# Altium PCB Rackmount_DSP.PcbDoc (part 12 of 24)
Units mil, origin at the board's own origin, x right, y up, seen from the top; angles counter-clockwise.
Board outline 10629.92 x 8267.72 mil, 4 copper layers (Top Layer, Mid Layer 1, Mid Layer 2, Bottom Layer), stack 36.2 mil thick; 4500 components, 1565 nets, 9765 pads, 3289 vias.
Unrouted connection lines stored in the file: 1.
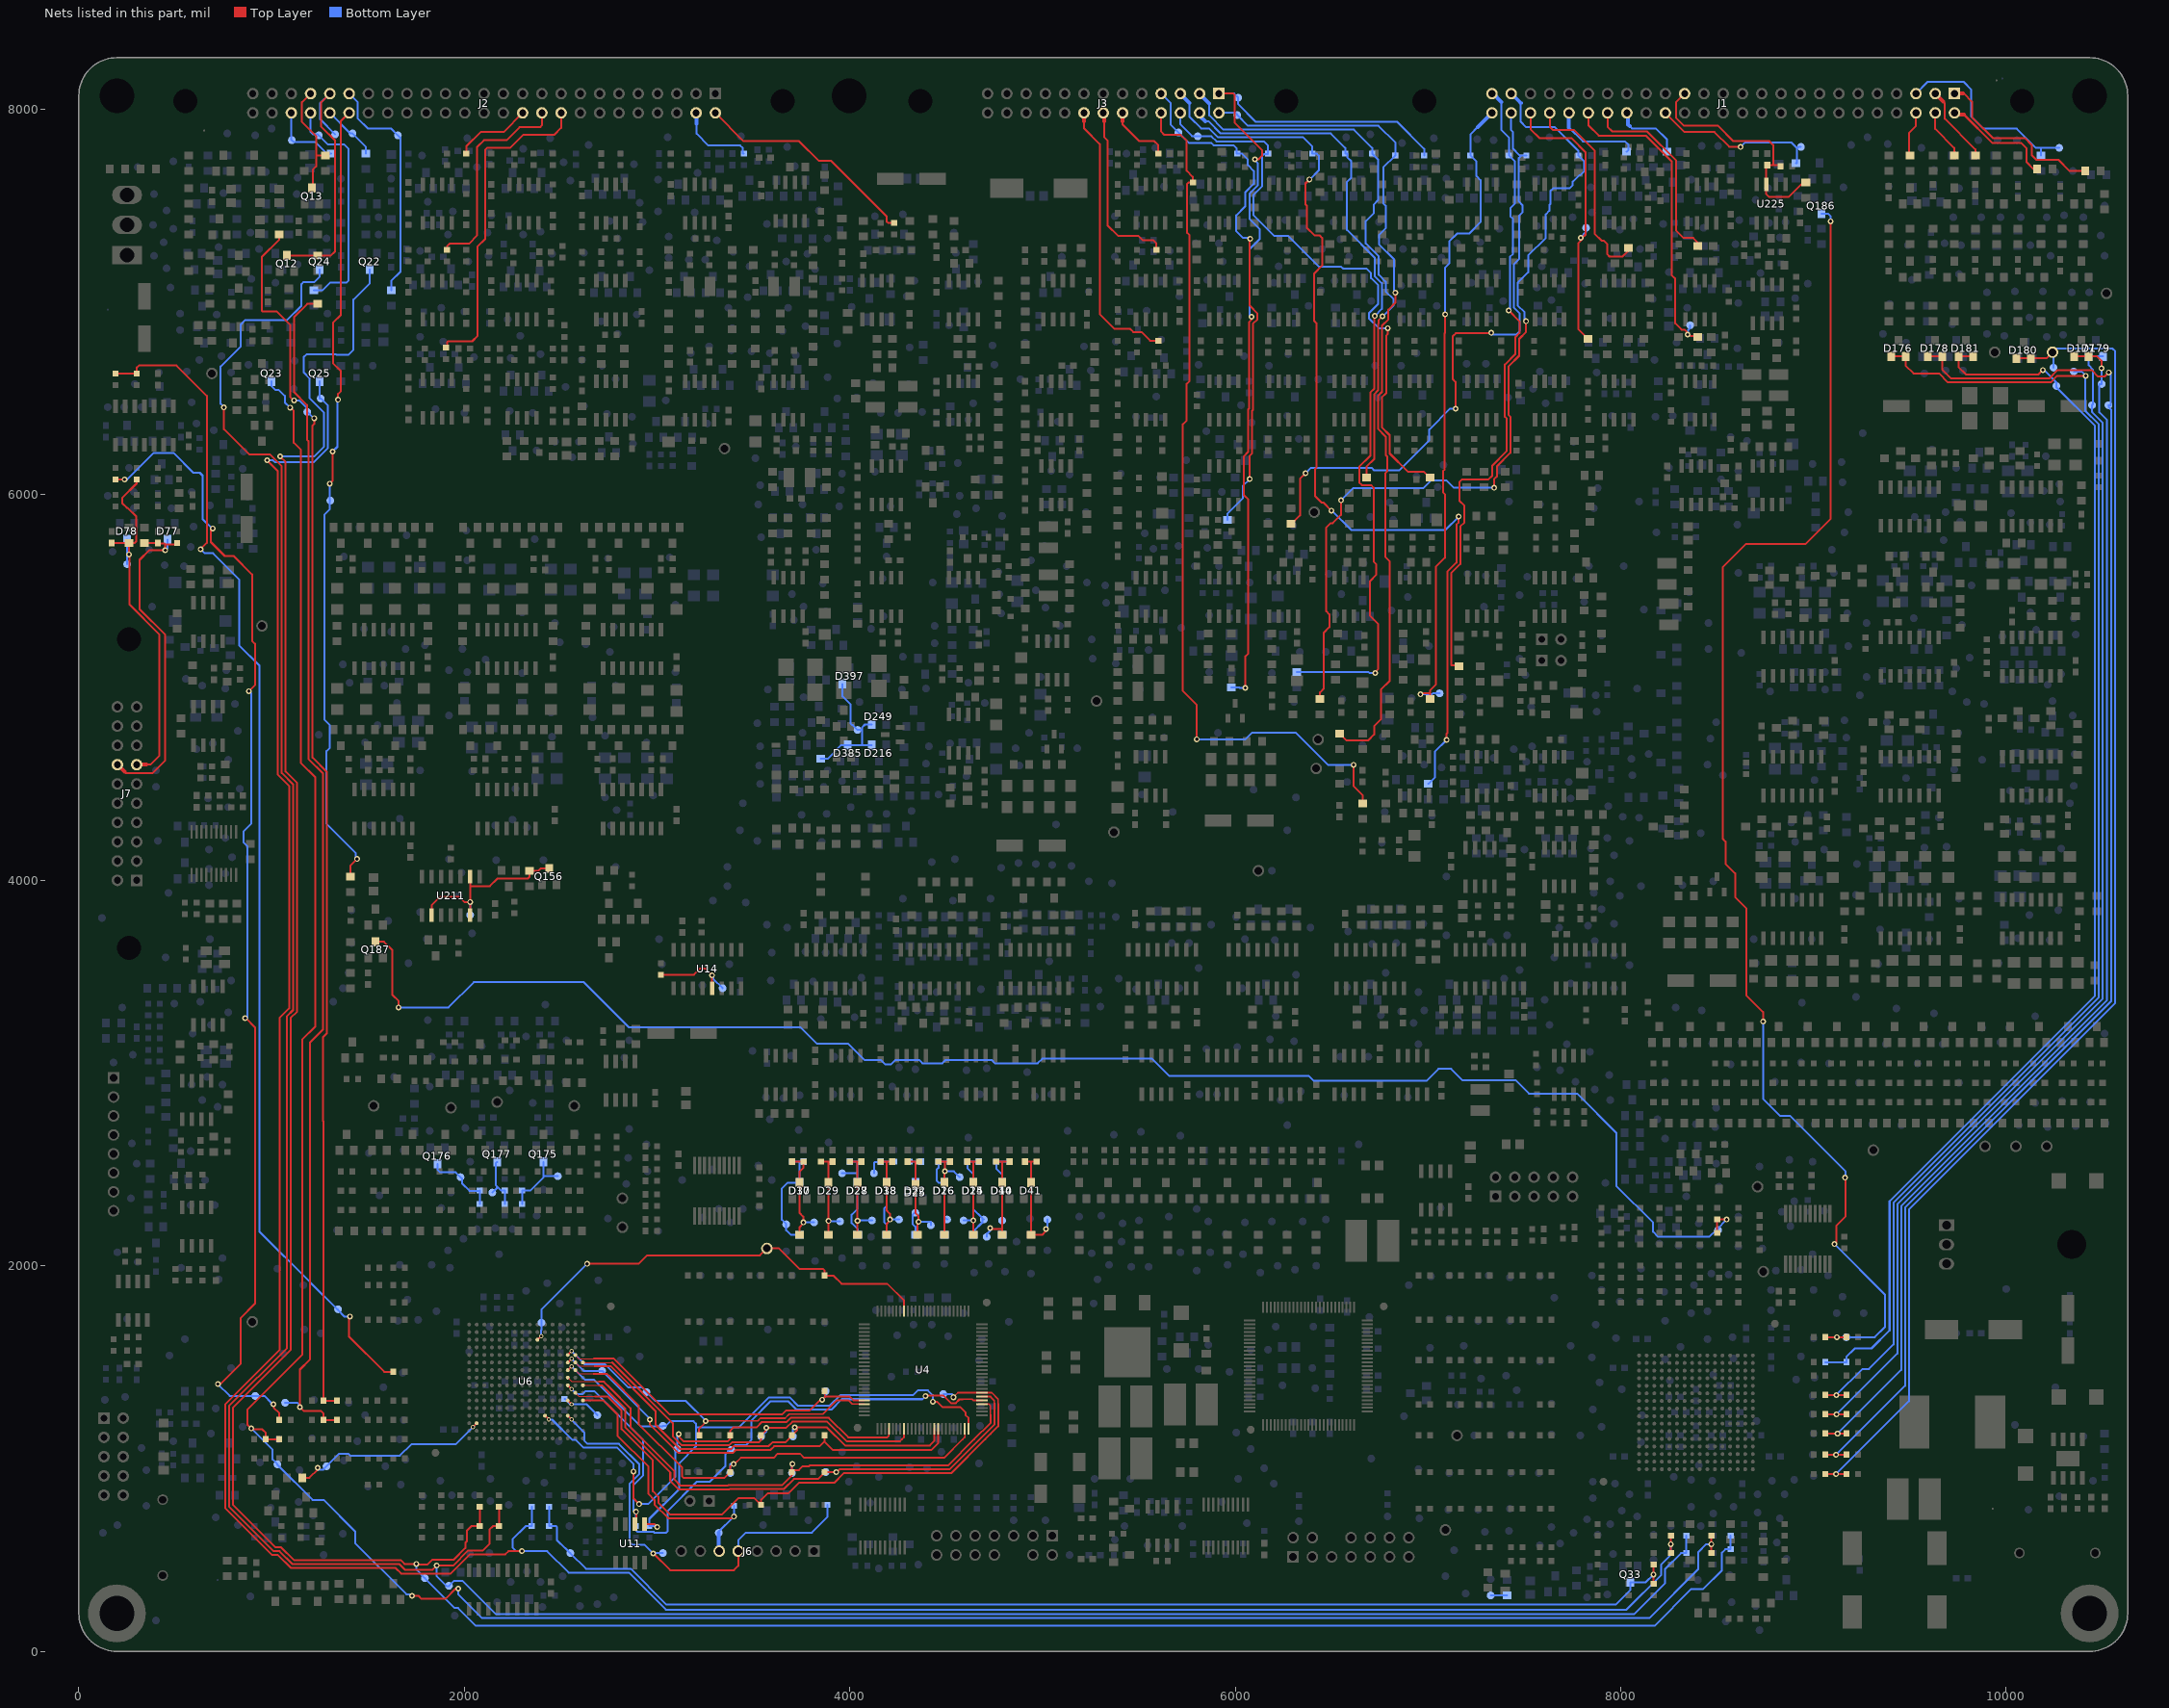
[diagram p14: the nets of this part, all layers, seen from the top]

## Via types
v1: diameter 30, hole 16, Top Layer to Bottom Layer, 3143 vias
v2: diameter 22, hole 12, Top Layer to Bottom Layer, 146 vias

## Nets (pads, with @x,y where several pads share a name; then routed paths per layer and width w, separated by ;. In a path a pad name is that pad's centre, name@x,y a point inside that pad or via, vN(x,y) a via of type N, cw(c..) or ccw(c..) an arc to the next point about the centre after c; other vN are vias at no path point) (continued)
INV_GPIO_22: R772.2 TP619.1 U4.71 U6.B5 | length 1755.1
  Top Layer w6: U6.B5@2575.91,1537.8 2594.91,1518.8 2672.85,1518.8
  Top Layer w9: 3432.28,1229 3606.54,1229 ; 3792.26,1250.6 3847.07,1305.41 v1(3855.91,1305.41) 3856.39,1305.41 3872.47,1321.5 ; R772.2@3870,1350 3870,1323.97 3872.47,1321.5 ; U4.71@4074.88,1302.52 4040,1302.52 4018.98,1302.52 4000,1321.5 3872.47,1321.5
  Top Layer w10: 2672.85,1518.8 2755,1518.8 2775.47,1518.8 3065.27,1229 3432.28,1229 ; 3606.54,1229 3648.84,1229 3670.44,1250.6 3792.26,1250.6
  Bottom Layer w10: v1(3855.91,1305.41) 3875,1324.5 TP619.1@3875,1350
INV_GPIO_23: R769.2 TP235.1 U4.72 U6.C5 | length 1845.1
  Top Layer w9: 3230.02,1167.25 3252.59,1189.82 v1(3252.59,1193.96) 3252.59,1196.11 3522.7,1196.11 3536.09,1209.5 3664.14,1209.5 3685.73,1231.1 3860.23,1231.1 3931.63,1302.5 3992.13,1302.5 4011.79,1282.83 4040,1282.83 U4.72@4074.88,1282.83
  Top Layer w10: U6.C5@2536.54,1537.8 v2(2556.22,1557.48) ; R769.2@3220,1120 3216.47,1120 3216.47,1153.7 3230.02,1167.25
  Bottom Layer w10: v2(2556.22,1557.48) 2623.7,1490 2729.5,1490 2849.75,1369.75 2920.25,1369.75 TP235.1@2945,1345 2990.88,1299.12 3149.59,1299.12 3252.59,1196.11 v1(3252.59,1193.96)
INV_GPIO_24: R766.2 TP620.1 U4.83 U6.A6 | length 2107
  Top Layer w6: U6.A6@2615.28,1498.43 2755,1498.43 2767.56,1498.43 ; R766.2@3540,1119 R766.2@3540,1120
  Top Layer w9: 4158.27,1090.38 4261.07,1090.38 4270.69,1100 4281.57,1110.88 U4.83@4281.57,1154.88
  Top Layer w10: 2767.56,1498.43 3081.89,1184.09 3081.89,1115.1 3127.99,1069 3373.55,1069 3390.32,1085.78 3529.26,1085.78 3540,1096.52 R766.2@3540,1119 ; R766.2@3540,1120 3540,1121 3566.98,1147.98 v1(3566.98,1159.77) 3670.27,1159.77 3702.1,1191.6 3882.02,1191.6 3983.23,1090.38 4158.27,1090.38
  Bottom Layer w10: TP620.1@3540,1115 3566.98,1141.98 v1(3566.98,1159.77)
INV_GPIO_25: R856.2 TP621.1 U4.91 U6.B6 | length 2323.8
  Top Layer w6: U6.B6@2575.91,1498.43 2594.91,1479.43 2674.47,1479.43
  Top Layer w9: 4414.95,1068.53 4439.06,1092.63 4439.06,1100 U4.91@4439.06,1154.88
  Top Layer w10: 2674.47,1479.43 2755,1479.43 2758.27,1479.43 2992.18,1245.51 2992.18,1176.52 3119.71,1049 3382.7,1049 3398.65,1064.96 3579.1,1064.96 3598.62,1084.47 3665.47,1084.47 3700,1119 R856.2@3700,1120 3700,1121 3725.61,1146.61 3725.61,1152.7 v1@3716.71,1161.6 ; v1(3714.52,1161.6) v1@3716.71,1161.6 ; 4414.95,1068.53 4414.95,1067.51 3975.64,1067.51 3881.56,1161.6 v1@3716.71,1161.6
  Bottom Layer w10: TP621.1@3705,1115 3705,1152.08 v1(3714.52,1161.6)
INV_GPIO_26: R857.2 TP622.1 U4.99 U6.B7 | length 2581.7
  Top Layer w6: U6.B7@2575.91,1459.06 2594.97,1439.99 2671.22,1439.99 2671.22,1440.27
  Top Layer w9: R857.2@3380,930 3380,959.33 3388.39,967.72 v1@3388.39,971.32 ; v1@3394.17,977.1 v1@3388.39,971.32 ; v1(3397.02,971.32) v1@3388.39,971.32 ; v1@3400.59,970.69 3434.32,1004.42 3605.32,1004.42 3625.88,1024.97 3741.66,1024.97 3762.28,1004.35 4490.01,1004.35 4585.65,1100 4596.54,1110.88 U4.99@4596.54,1154.88
  Top Layer w10: 2671.22,1440.27 2739.67,1440.27 2755,1424.93 2904.73,1275.2 2904.73,1179.12 3128.5,955.35 3128.5,909.29 3138.79,899 3349,899 R857.2@3380,930 ; v1@3394.17,977.1 v1@3400.59,970.69
  Bottom Layer w10: TP622.1@3380,925 3380,971.32 3388.39,971.32 v1(3397.02,971.32)
INV_GPIO_27: R855.2 TP234.1 U4.79 U6.F13 | length 2530.3
  Top Layer w9: 4147.33,1110.38 4193.86,1110.38 4202.83,1119.36 U4.79@4202.83,1154.88
  Top Layer w10: U6.F13@2418.43,1222.83 v2(2438.11,1203.15) ; v1(2878.15,933.51) 2878.15,793.83 2878.15,792.39 v1(2906.39,764.15) ; v1(3111.89,1127.52) 3111.89,1115.89 3138.79,1089 3364.94,1089 3380,1104.06 R855.2@3380,1120 3380,1145.66 3395.6,1161.26 3515.43,1161.26 3544.17,1190 3672.21,1190 3693.81,1211.6 3891,1211.6 3992.22,1110.38 4040,1110.38 4147.33,1110.38
  Bottom Layer w10: v2(2438.11,1203.15) 2439.07,1202.19 2455.3,1202.19 2560.97,1096.51 2578.44,1096.51 2618.6,1056.36 2793.14,1056.36 2878.15,971.35 v1(2878.15,933.51) ; v1(2906.39,764.15) 2906.39,764.57 2953.65,764.57 3094.91,905.83 3094.91,1034.49 3105,1044.57 TP234.1@3105,1050 3105,1122.78 3109.74,1127.52 v1(3111.89,1127.52)
INV_GPIO_28: R765.2 TP233.1 U4.92 U6.C6 | length 2315.7
  Top Layer w9: 4392.04,1045.37 4423.84,1045.37 4458.74,1080.28 4458.74,1100 U4.92@4458.74,1154.88
  Top Layer w10: U6.C6@2536.54,1498.43 v2(2556.22,1518.11) ; v1(2962.18,1201.76) 2962.18,1178.24 3111.42,1029 3392.35,1029 3408.12,1044.77 3587.62,1044.77 3607.33,1064.47 3843.65,1064.47 3870,1090.82 ; R765.2@3870,1120 3870,1090.82 ; 4392.04,1045.37 3910.84,1045.37 3870,1086.22 3870,1090.82
  Bottom Layer w10: v2(2556.22,1518.11) 2619.33,1455 TP233.1@2715,1455 2962.18,1207.82 v1(2962.18,1201.76)
INV_GPIO_29: R768.2 TP623.1 U4.4 U6.C8 | length 2879.1
  Top Layer w6: U6.C8@2536.54,1419.68 2555.66,1400.56 2696.72,1400.56
  Top Layer w9: U4.4@4685.12,1282.83 4721.15,1282.83 4729.62,1274.36 4729.62,1227.33
  Top Layer w10: 2696.72,1400.56 2705.87,1400.56 2708.11,1398.31 2724.46,1398.32 2755,1367.78 2861.28,1261.5 2861.28,1163.96 3088.5,936.75 3088.5,892.72 3122.22,859 3365.57,859 3368.49,861.92 3648.67,861.92 3700,913.25 R768.2@3700,930 R768.2@3700,941 ; v1(3702.69,972.79) 3700,970.1 R768.2@3700,941 ; 4729.62,1227.33 4729.62,1184.28 4645.34,1100 4509.29,963.95 3791.74,963.95 3787.79,960 3754.8,960 3735.8,941 R768.2@3700,941
  Bottom Layer w10: TP623.1@3700,925 3700,970.1 v1(3702.69,972.79)
INV_GPIO_30: R771.2 TP624.1 U4.6 U6.A9 | length 2834.8
  Top Layer w6: U6.A9@2615.28,1380.32 2696.53,1380.32 2698.62,1378.22
  Top Layer w9: U4.6@4685.12,1322.2 4729.12,1322.2 4730,1321.32 4749.62,1301.7 4749.62,1286.7
  Top Layer w10: 2698.62,1378.22 2715.98,1378.22 2755,1339.2 2835.77,1258.43 2835.77,1160.89 3068.5,928.17 3068.5,884.44 3113.93,839 3373.85,839 3376.04,841.18 3656.5,841.18 3709.75,894.44 3835.44,894.44 3870,929 R771.2@3870,930 v1(3929.65,930) 3932.48,930 3946.43,943.95 4517.57,943.95 4673.62,1100 4730,1156.38 4749.62,1176 4749.62,1286.7
  Bottom Layer w10: TP624.1@3875,930 v1(3929.65,930)
INV_GPIO_31: R774.2 TP625.1 U4.7 U6.B10 | length 3318.2
  Top Layer w6: U6.B10@2575.91,1340.94 2594.91,1321.94 2678.47,1321.94 2678.47,1322.13
  Top Layer w9: v1(4537.2,1318.18) 4560.91,1341.89 U4.7@4685.12,1341.89 4730,1341.89 4736.3,1341.89 4769.62,1308.57 4769.62,1283.72
  Top Layer w10: 2678.47,1322.13 2742.88,1322.13 2755,1310.01 2815.49,1249.52 2815.49,1152.82 2978.37,989.95 2978.37,830.48 3006.95,801.91 3006.95,770.45 3066.35,711.05 3337.76,711.05 3421.17,794.46 3505.54,794.46 R774.2@3540,760 3540,786.27 3574.75,821.01 3682.8,821.01 3736,874.22 3918.93,874.22 3968.67,923.95 4525.85,923.95 4701.9,1100 4730,1128.1 4769.62,1167.71 4769.62,1283.72
  Bottom Layer w10: TP625.1@4485,1335 4530.13,1335 4537.2,1327.93 v1(4537.2,1318.18)
INV_GPIO_32: R844.2 TP210.1 U4.100 U6.C7 U11.5 | length 3238.9
  Top Layer w9: 4600.48,1239.99 4600.48,1225.87 4616.22,1210.13 U4.100@4616.22,1154.88
  Top Layer w10: U6.C7@2536.54,1459.06 v2(2556.22,1478.74) ; U11.5@2935,660 2986.16,660 2998.86,647.3 3001.07,647.3 v1@3001.07,645.08 ; v1(4430.32,1295.46) 4452.81,1295.46 4480.08,1268.18 4572.29,1268.18 4600.48,1239.99
  Bottom Layer w10: v2(2556.22,1478.74) 2624.71,1410.25 2671.52,1410.25 2914.33,1167.44 3030,1167.44 TP210.1@3030,1170 3046.15,1170 3069.55,1193.4 3189.26,1193.4 3201.67,1180.99 3201.67,1162.73 ; v1(3001.04,645.06) 2996.1,650 R844.2@2960,650 2960,687.6 3114.91,842.51 3114.91,976.1 3201.67,1062.85 3201.67,1162.73 ; v1(4430.32,1295.46) 4430.32,1328.38 4404.69,1354 4353.03,1354 4328.03,1329 3950.67,1329 3896.08,1274.41 3731.09,1274.41 3688.42,1317.08 3580.54,1317.08 3426.19,1162.73 3201.67,1162.73
INV_GPIO_33: R843.2 TP209.1 U4.5 U6.C9 U11.6 | length 3408.7
  Top Layer w9: 4586.18,1307.79 4634.67,1307.79 4639.94,1302.52 U4.5@4685.12,1302.52
  Top Layer w10: U6.C9@2536.54,1380.32 v2(2556.22,1360.63) ; U11.6@2885,660 2891.5,660 2891.5,723.58 v1(2891.01,724.07) ; v1(4392.27,1324) 4392.27,1326.41 4486.55,1326.41 4524.78,1288.18 4549.63,1288.18 4568.28,1306.84 4586.18,1306.84 4586.18,1307.79
  Bottom Layer w10: v2(2556.22,1360.63) 2582.22,1334.63 2613.25,1334.63 2628.62,1350 2673.65,1350 2928.15,1095.5 2928.15,912.79 2876.39,861.03 2876.39,732.3 2884.62,724.07 v1(2891.01,724.07) 2891.01,694.07 2890,693.06 R843.2@2890,650 2890,628.05 2898.05,620 2982.21,620 2987.16,615.06 3045.69,615.06 3055,624.37 3055,728.64 3206.36,880 3272.39,880 3354.7,962.31 3354.7,1024.16 3375.54,1045 TP209.1@3385,1045 3385,1048.29 3405.47,1068.76 3460.65,1068.76 3489.94,1098.05 3489.94,1198.2 3588.82,1297.08 3680.13,1297.08 3722.81,1254.41 3904.36,1254.41 3958.13,1308.18 4376.45,1308.18 v1(4392.27,1324)
INV_GPIO_34: R778.2 TP4.1 TP208.1 U4.43 U6.G3 | length 2359.7
  Top Layer w9: 3959.41,1906.49 4194.67,1906.49 4281.57,1819.59 4281.57,1810 U4.43@4281.57,1765.12
  Top Layer w10: U6.G3@2379.06,1616.54 v2(2398.74,1636.22) ; v1(2636.48,2010.13) 2904.38,2010.13 2949.14,2054.88 3533.1,2054.88 3568.23,2090 TP4.1@3570,2090 3632.62,2090 3738.41,1984.21 3861.15,1984.21 3870,1975.36 R778.2@3870,1950 3913.93,1950 3957.44,1906.49 3959.41,1906.49
  Bottom Layer w10: v2(2398.74,1636.22) 2398.74,1665.48 2400,1666.74 TP208.1@2400,1705 2400,1773.64 v1(2636.48,2010.13)
INV_IINV_A/VINV_DC_A: C320.2 D24.3 R614.1 R915.2 TP626.1 | length 491.2
  Top Layer w10: C320.2@4610,2540 4640,2540 ; R614.1@4640,2160 4640,2178.33 4640.52,2178.85 v1(4640.52,2235) 4640.52,2431.5 D24.3@4640,2431.5 4640,2540 ; R915.2@4670,2540 4640,2540
  Bottom Layer w10: TP626.1@4590,2235 v1(4640.52,2235)
INV_IINV_B/VINV_DC_B: C328.2 D15.3 R625.1 R890.2 TP207.1 | length 500.7
  Bottom Layer w10: R625.1@4640,2160 4642.6,2160 4642.6,2180.6 4687.96,2225.96 TP207.1@4687.96,2240 ; C328.2@4670,2540 R890.2@4610,2540 4610,2506.95 4640,2476.95 D15.3@4640,2431.5 4640,2295 4687.96,2247.04 TP207.1@4687.96,2240 ; TP207.1@4695,2240 TP207.1@4687.96,2240
INV_IINV_C/VINV_DC_C: C326.2 D14.3 R623.1 R888.2 TP627.1 | length 569.8
  Top Layer w10: v1(4727.97,2195.76) 4727.97,2192.03 4790,2192.03 ; R888.2@4760,2540 4788,2540 ; R623.1@4790,2160 4790,2192.03 ; C326.2@4830,2540 4788,2540 ; 4788,2540 4790,2538 D14.3@4790,2431.5 4790,2192.03
  Bottom Layer w10: TP627.1@4710,2150 4710,2163.56 4727.97,2181.53 v1(4727.97,2195.76)
INV_IL_A/IL_AF: C323.2 D25.3 R617.1 R916.2 TP628.1 | length 534.8
  Top Layer w10: C323.2@4300,2540 4340,2540 ; R617.1@4350,2160 4350,2227.83 v1(4356.93,2227.83) 4356.93,2257.83 4340,2274.76 D25.3@4340,2421.5 4340,2540 ; R916.2@4360,2540 4340,2540
  Bottom Layer w10: v1(4356.93,2227.83) 4420,2227.83 TP628.1@4420,2210
INV_IL_B/IL_BF: C322.2 D16.3 R616.1 R920.2 TP629.1 | length 531
  Top Layer w10: R920.2@4460,2540 4492.59,2540 ; R616.1@4490,2160 D16.3@4490,2431.5 4490,2487.69 v1(4492.59,2490.28) 4492.59,2540 ; C322.2@4520,2540 4492.59,2540
  Bottom Layer w10: v1(4492.59,2490.28) 4539.72,2490.28 TP629.1@4570,2460
INV_IL_C/IL_CF: C321.2 D26.3 R615.1 R918.2 TP206.1 | length 498.7
  Bottom Layer w10: R615.1@4490,2160 4490,2255 ; TP206.1@4505,2240 4490,2255 ; R918.2@4520,2540 C321.2@4460,2540 4460,2508.45 4450.74,2499.19 4450.74,2441.14 4460.38,2431.5 D26.3@4490,2431.5 4490,2255
INV_IL_OCP_A: Q175.3 R757.2 R1042.2 TP1873.1 | length 364.5
  Bottom Layer w10: R1042.2@2300,2320 R757.2@2300,2390 2342.75,2390 2410,2457.25 2410,2465.88 ; Q175.3@2410,2538.5 2410,2465.88 ; TP1873.1@2485,2465 2484.12,2465.88 2410,2465.88
INV_IL_OCP_B: Q176.3 R724.2 R1041.2 TP1872.1 | length 378.8
  Bottom Layer w10: Q176.3@1860,2528.5 1860,2499 1874.26,2484.75 1955.25,2484.75 TP1872.1@1980,2460 1988.37,2451.63 1988.37,2427.85 2026.74,2389.47 R724.2@2080,2389.47 ; R1041.2@2080,2320 R724.2@2080,2389.47 ; R724.2@2080,2390 R724.2@2080,2389.47
INV_IL_OCP_C: Q177.3 R722.2 R1040.2 TP1871.1 | length 295
  Bottom Layer w10: TP1871.1@2145,2380 2168.33,2403.33 2168.33,2412.59 ; Q177.3@2170,2538.5 2162.18,2530.68 2162.18,2418.74 2168.33,2412.59 ; R1040.2@2210,2320 R722.2@2210,2390 2190.92,2390 2168.33,2412.59
INV_INDICTOR: R1080.1 TP205.1 U6.R14 | length 1049.3
  Top Layer w10: R1080.1@1160,900 1196.17,900 1239.39,943.22 v1(1239.39,953) ; v2(2044.41,1163.78) U6.R14@2064.09,1183.46
  Bottom Layer w10: v1(1239.39,953) 1239.39,943.22 1268.22,943.22 TP205.1@1285,960 1350,1025 1398.23,1025 1408.23,1015 1665.5,1015 1725,1074.5 1955.13,1074.5 v2(2044.41,1163.78)
INV_OUT_I_A: C316.1 D28.3 R609.1 R922.2 TP630.1 | length 515.4
  Top Layer w10: R922.2@4000,2540 4040,2540 ; R609.1@4040,2160 v1(4040,2233.96) D28.3@4040,2431.5 4040,2540 ; C316.1@4060,2540 4040,2540
  Bottom Layer w10: v1(4040,2233.96) 4041.04,2235 TP630.1@4115,2235
INV_OUT_I_B: C315.1 D29.3 R608.1 R923.2 TP631.1 | length 503.9
  Top Layer w10: R923.2@3850,2540 3886.92,2540 C315.1@3896.93,2540 ; R608.1@3890,2160 v1(3890,2232.6) D29.3@3890,2431.5 3890,2533.07 C315.1@3896.93,2540 ; C315.1@3910,2540 C315.1@3896.93,2540
  Bottom Layer w10: v1(3890,2232.6) 3892.6,2230 TP631.1@3950,2230
INV_OUT_I_C: C314.1 D30.3 R607.1 R924.2 TP632.1 | length 520.1
  Top Layer w10: C314.1@3700,2540 3752,2540 R924.2@3760,2540 3760,2510 3740,2490 D30.3@3740,2431.5 3740,2273.41 3758.41,2255 v1(3758.41,2225) 3758.41,2219.38 3740,2200.98 R607.1@3740,2160
  Bottom Layer w10: v1(3758.41,2225) TP632.1@3815,2225
INV_SCI_RXD: J6.6 R2731.1 TP201.1 U6.A11 | length 1476.3
  Top Layer w10: U6.A11@2615.28,1301.57 2722.08,1301.57 2755,1268.65 2794.14,1229.52 2794.14,1119.28 2955.32,958.09 2955.32,816.39 2986.95,784.76 2986.95,762.16 3058.06,691.05 3398.33,691.05 v1(3398.33,699.11)
  Bottom Layer w10: TP201.1@3320,615 3317.11,617.89 v1(3398.33,699.11) 3400,700.78 R2731.1@3400,755
  Bottom Layer w20: TP201.1@3320,615 3320,522.36 J6.6@3322.36,520
INV_SCI_TXD: J6.5 R2730.1 TP200.1 U6.C13 | length 2322.5
  Top Layer w10: U6.C13@2536.54,1222.83 v2(2556.22,1203.15) ; v1(2979.38,508.32) 2979.83,508.32 3067.61,420.54 3398.33,420.54 3420.79,442.99 J6.5@3420.79,520
  Bottom Layer w10: v2(2556.22,1203.15) 2556.22,1200.55 2621.59,1135.18 2621.59,1092.94 2638.06,1076.47 2801.31,1076.47 2908.15,969.64 2908.15,921.08 2856.34,869.27 2856.34,566.96 2870.19,553.11 2934.58,553.11 v1(2979.38,508.32) 2993.32,508.32 2995,510 TP200.1@3030,510 ; J6.5@3420.79,520 3420.79,576.21 3460.93,616.35 3803.45,616.35 3885,697.9 R2730.1@3885,760
INV_SET: R714.1 TP634.1 U6.C11 | length 233
  Top Layer w10: U6.C11@2536.54,1301.57 v2(2556.22,1281.89)
  Bottom Layer w10: R714.1@2520,1310 2521,1310 2549.11,1281.89 v2(2556.22,1281.89) 2633.11,1281.89 TP634.1@2690,1225
INV_SHUT: Q156.3 R2416.2 TP1589.1 U211.2 U211.9 U211.13 | length 1014.4
  Top Layer w10: U211.9@1830,3820 1830,3870 1875.07,3915.07 1972.83,3915.07 2000,3887.89 v1(2030,3887.89) ; U211.13@2030,3820 v1(2030,3887.89) ; U211.2@2030,4020 2030,3970 ; Q156.3@2440,4061.5 2396,4061.5 2384.5,4050 R2416.2@2338,4050 2338,4018.1 2329.14,4009.24 2171.49,4009.24 2132.25,3970 2030,3970 ; v1(2030,3887.89) 2030,3970
  Bottom Layer w10: TP1589.1@2030,3820 v1(2030,3887.89)
INV_shutdown: D216.1 D249.2 D385.3 D397.2 R1840.1 TP228.1 | length 736.5
  Bottom Layer w10: R1840.1@3850,4630 3884.59,4630 3956.09,4701.5 D385.3@3990,4701.5 3991.5,4700 4063.35,4700 4063.35,4701.5 ; D397.2@3962.5,5018.5 3962.5,4953.64 4004.97,4911.17 4004.97,4812.95 4013.17,4804.75 4015.25,4804.75 TP228.1@4040,4780 4063.35,4780 ; D216.1@4112.5,4701.5 4063.35,4701.5 ; D249.2@4112.5,4808.5 4078.78,4808.5 4063.35,4793.07 4063.35,4780 ; 4063.35,4701.5 4063.35,4780
INV_SYNC: C425.1 D77.3 J7.14 R1483.1 R1486.2 TP635.1 | length 1818.4
  Top Layer w10: 236.87,4563.13 245,4555 381.23,4555 448.18,4621.95 448.18,5273.69 314.99,5406.88 314.99,5662.47 364.73,5712.22 v1@448.18,5712.22 ; R1486.2@340,5750 C425.1@410,5750 410,5746.22 444.59,5746.22 448.18,5742.63 ; v1(448.42,5712.22) v1@448.18,5712.22 ; R1483.1@510,5750 510,5742.63 448.18,5742.63 ; v1@448.18,5712.22 448.18,5742.63
  Top Layer w20: J7.14@200,4600 236.87,4563.13
  Bottom Layer w10: v1(448.42,5712.22) 460,5723.8 D77.3@460,5768.5
INV_SYNC_F: R872.1 R1062.2 R1494.1 TP1785.1 | length 6145.6
  Top Layer w10: R1494.1@190,6630 R872.1@300,6630 300,6659.43 311.52,6670.96 506.24,6670.96 664.19,6513.01 664.19,5750.4 v1(631.4,5717.57) ; v1(1406.42,1737.27) 1401.38,1737.27 1401.38,1632.63 1584.01,1450 R1062.2@1630,1450
  Bottom Layer w10: v1(631.4,5717.57) 652.61,5696.36 695.99,5696.36 833.25,5559.1 833.25,5217.04 936.87,5113.43 936.87,2177.63 1200,1914.5 1200,1913.69 TP1785.1@1341.85,1771.85 ; TP1785.1@1345,1775 TP1785.1@1341.85,1771.85 ; v1(1406.42,1737.27) 1376.42,1737.27 TP1785.1@1341.85,1771.85
INV_VBP_A/VOUT_A: C319.1 D38.3 R612.1 R904.2 TP226.1 | length 552
  Bottom Layer w10: TP226.1@4125,2480 4125,2533.25 4130.34,2538.59 4160,2538.59 C319.1@4160,2540 4188.86,2540 ; R612.1@4190,2160 4190,2215.91 4178.33,2227.57 4178.33,2296.73 4190,2308.39 D38.3@4190,2431.5 4190,2538.86 4188.86,2540 ; R904.2@4230,2540 4188.86,2540
INV_VBP_B/VOUT_B: C318.1 D18.3 R611.1 R909.2 TP636.1 | length 501.9
  Top Layer w10: R909.2@4160,2540 4168,2540 4190,2540 ; R611.1@4190,2160 4190,2215.91 4208.33,2234.24 v1(4208.33,2240) 4208.33,2270 4190,2288.33 D18.3@4190,2431.5 4190,2540 ; C318.1@4220,2540 4190,2540
  Bottom Layer w10: v1(4208.33,2240) TP636.1@4255,2240
INV_VBP_C/VOUT_C: C317.1 D27.3 R610.1 R921.2 TP225.1 | length 545.4
  Bottom Layer w10: TP225.1@3960,2480 4038.16,2480 ; C317.1@4000,2540 4039.69,2540 ; R610.1@4040,2160 4040.06,2160 4040.06,2191.48 4010,2221.54 4010,2265 4040,2295 D27.3@4040,2431.5 4038.16,2433.34 4038.16,2480 ; R921.2@4060,2540 4039.69,2540 ; 4038.16,2480 4039.69,2480 4039.69,2540
INV_VBUS_P/VBUS_N: C313.1 D17.3 R606.1 R919.2 TP224.1 | length 581.1
  Bottom Layer w10: R919.2@3700,2540 3737.51,2540 ; R606.1@3740,2160 3694.59,2160 3670,2184.59 TP224.1@3670,2215 3670,2216.32 3647.4,2238.91 3647.4,2401.7 3677.2,2431.5 D17.3@3740,2431.5 3740,2537.51 3737.51,2540 ; C313.1@3760,2540 3737.51,2540
INV_VINV_A: C327.2 D41.3 R624.1 R889.2 TP637.1 | length 589.1
  Top Layer w10: C327.2@4910,2540 4940,2540 ; R889.2@4970,2540 4940,2540 ; v1(5017.12,2190.37) 5017.12,2179.31 4997.81,2160 R624.1@4940,2160 D41.3@4940,2431.5 4940,2540
  Bottom Layer w10: v1(5017.12,2190.37) 5025,2198.25 TP637.1@5025,2240
INV_VINV_B: C324.2 D40.3 R618.1 R931.2 TP223.1 | length 462.4
  Bottom Layer w10: R618.1@4790,2160 TP223.1@4790,2235 D40.3@4790,2431.5 4790,2475.43 4760,2505.43 R931.2@4760,2540 C324.2@4830,2540
INV_VINV_C: R932.2 TP638.1 U14.13 | length 453.9
  Top Layer w10: R932.2@3020,3510 3191.51,3510 3223.05,3541.54 3251.6,3541.54 v1(3285.67,3507.47) 3285,3506.81 U14.13@3285,3440
  Bottom Layer w10: v1(3285.67,3507.47) 3291.38,3507.47 3291.38,3488.62 TP638.1@3340,3440
INV_VINV_C/ADREF: C759.1 D22.3 R613.1 R913.2 TP222.1 | length 455.6
  Bottom Layer w10: R913.2@4310,2540 4340,2540 ; R613.1@4340,2160 4340,2202.33 4326.93,2215.4 4326.93,2266.73 TP222.1@4340,2279.8 ; TP222.1@4340,2275 TP222.1@4340,2279.8 ; C759.1@4370,2540 4340,2540 ; TP222.1@4340,2279.8 D22.3@4340,2431.5 4340,2540
IR1+: J1.47 R1214.1 R2243.1 TP639.1 | length 4538.7
  Top Layer w10: R1214.1@6440,4940 6440,4975 6458.78,4993.78 6458.78,5283.66 6488.5,5313.38 6488.5,5379.16 6471.95,5395.7 6471.95,5830.54 6494.26,5852.84 6505.22,5852.84 6548.04,5895.66 v1(6548.04,5971.14) ; v1(7342.34,6035.92) 7342.34,6080.35 7357.9,6095.91 7357.9,6148.44 7427.2,6217.74 7427.2,6405.43 7419,6413.63 7419,6667.72 7472.66,6721.38 7472.66,6808.79 7508.61,6844.74 v1(7508.61,6900.03)
  Bottom Layer w10: v1(6548.04,5971.14) 6611.89,6035 6976.65,6035 7016.65,6075 7094.28,6075 7133.36,6035.92 v1(7342.34,6035.92) ; J1.47@7431.5,8081.5 TP639.1@7435,8085 ; 7481.5,8031.5 7481.5,7935.2 7510.01,7906.69 7658.29,7906.69 7780,7784.98 R2243.1@7780,7760 7781,7760 7811,7730 7811,7678.79 7791.13,7658.91 7785.5,7658.91 7750.92,7624.34 7750.92,7607.7 7733.21,7590 7649.29,7590 7635,7575.71 7635,7508.97 7629.46,7503.43 7629.46,7474.02 7610.79,7455.36 7610.79,7333.09 7519.24,7241.53 7519.24,7154.42 7465,7100.18 7465,6983.18 7500.98,6947.2 7500.98,6900.03 v1(7508.61,6900.03)
  Bottom Layer w20: J1.47@7431.5,8081.5 7481.5,8031.5
IR1-: J3.3 R1215.1 R2237.1 TP219.1 | length 2918.3
  Top Layer w10: R1215.1@6680,6090 6680,6145.63 6721,6186.63 6721,6332.85 6720,6333.85 6720,6521.46 6741,6542.46 6741,6885.5 6743.05,6887.55 6743.05,6904.12 6742.74,6904.42 v1(6763.95,6925.64)
  Bottom Layer w10: 5864.96,8030.04 5864.96,7967.86 5937.82,7895 6615,7895 6710,7800 R2237.1@6710,7770 6711,7770 6741,7740 6741,7528.85 6717.5,7505.35 6717.5,7460.26 6676.81,7419.58 6676.81,7304.39 6744.63,7236.58 6744.63,7141.57 6780.66,7105.53 6780.66,7055.65 6821.15,7015.16 6821.15,6982.83 v1(6763.95,6925.64)
  Bottom Layer w20: J3.3@5814.96,8081.5 TP219.1@5815,8080 TP219.1@5815,8080 5864.96,8030.04
IR2+: J1.48 R1155.1 R2238.1 TP218.1 | length 3243.4
  Top Layer w10: R1155.1@6290,5850 6292.5,5850 6335.41,5892.91 6335.41,6082.58 v1(6364.91,6112.09) ; v1(7142.59,6447.35) 7142.59,6585.55 7129,6599.14 7129,6823.71 7143.64,6838.36 7327.86,6838.36 v1(7327.86,6840.44)
  Bottom Layer w10: v1(6364.91,6112.09) 6392.83,6140 6707.67,6140 6721.02,6126.65 6849.88,6126.65 7006.15,6282.92 7006.15,6338.48 7115.01,6447.35 v1(7142.59,6447.35) ; v1(7327.86,6840.44) 7327.86,6830.11 7457.47,6830.11 7475.05,6847.68 7475.05,6942.09 7445,6972.14 7445,7195.68 7473.99,7224.67 7473.99,7448.95 7490,7464.97 7490,7503.05 7471.03,7522.02 7471.03,7746.98 7484.05,7760 ; TP218.1@7435,7985 J1.48@7431.5,7981.5 7431.5,7891.77 7439.34,7883.92 7439.34,7797.74 7477.09,7760 7484.05,7760 ; R2238.1@7510,7760 7484.05,7760
IR2-: J3.4 R1159.1 R2232.1 TP217.1 | length 4227.7
  Top Layer w10: v1(6723.7,6927.81) 6721,6925.11 6721,6550.75 6700,6529.75 6700,6325.57 6701,6324.57 6701,6204.13 6642.5,6145.63 6642.5,6063.79 6656.29,6050 6703.71,6050 6717.5,6036.21 6717.5,5652.92 6731.82,5638.6 6731.82,5585.48 6699.06,5552.72 6699.06,5372.24 6741.76,5329.54 6741.76,5095.87 6725.85,5079.96 v1(6725.85,5075.77)
  Bottom Layer w10: J3.4@5814.96,7981.5 TP217.1@5815,7980 TP217.1@5815,7980 ; 5844.67,7936.5 5862.69,7936.5 5924.2,7874.99 6495.01,7874.99 6570,7800 R2232.1@6570,7770 6581,7770 6581,7751.21 6601,7731.21 6601,7645.25 6577.5,7621.75 6577.5,7516.54 6579.4,7514.64 6579.4,7373.52 6724.63,7228.29 6724.63,7133.28 6760,7097.91 6760,6964.11 v1(6723.7,6927.81) ; R1159.1@6320,5080 6691.61,5080 6695.85,5075.77 v1(6725.85,5075.77)
  Bottom Layer w20: TP217.1@5815,7980 5815,7966.17 5844.67,7936.5
IS1+: J1.49 R1181.1 R2242.1 TP216.1 | length 3372.2
  Top Layer w10: R1181.1@7160,5110 7160,5114.57 7122.5,5114.57 7120,5117.07 7120,5592.96 7167.5,5640.46 7167.5,5835.55 7188.87,5856.91 7188.87,5943.38 7162.5,5969.75 7162.5,6066.21 7176.29,6080 7313.71,6080 7333.31,6099.59 7333.31,6152.13 7407.2,6226.03 7407.2,6397.14 7399,6405.35 7399,6676 7452.66,6729.66 7452.66,6817.08 7475.05,6839.46 7475.05,6899.67 v1(7418.6,6956.12)
  Bottom Layer w10: J1.49@7331.5,8081.5 TP216.1@7335,8085 ; 7381.5,8038.5 7381.5,7891.77 7419.34,7853.92 7419.34,7760 R2242.1@7420,7760 7421,7760 7451,7730 7451,7511.08 7426.98,7487.06 7426.98,7445.22 7441.12,7431.08 7441.12,7249.79 7425,7233.67 7425,6962.52 v1(7418.6,6956.12)
  Bottom Layer w20: TP216.1@7335,8085 7381.5,8038.5
IS1-: J3.5 R1182.1 R2245.1 TP642.1 | length 5091.3
  Top Layer w10: v1(6385,7636.69) 6363.79,7615.47 6363.79,7507.2 6371.53,7499.45 6371.53,7384.75 6411.53,7344.76 6438.97,7344.76 6451,7332.73 6451,7188.79 6409,7146.79 6409,6902.66 6421,6890.66 6421,6141.63 6413.93,6134.56 6413.93,5993.01 6447.3,5959.65 6456.78,5959.65 v1(6498.04,5918.4) ; v1(7096.78,4728.51) 7096.78,4760.22 7100,4763.44 7100,5601.24 7147.5,5648.74 7147.5,5845.55 7158.87,5856.91 v1(7158.87,5886.91)
  Bottom Layer w10: 5763.03,8031.97 5763.03,7960.1 5822.38,7900.75 5864.16,7900.75 5910.29,7854.62 6352.12,7854.62 6400,7806.74 R2245.1@6400,7770 6423.12,7770 6433.82,7759.29 6433.82,7684.4 6386.68,7637.26 6386.68,7636.69 v1(6385,7636.69) ; v1(6498.04,5918.4) 6500.87,5918.4 6601.97,5817.3 7089.25,5817.3 v1(7158.87,5886.91) ; R1182.1@7000,4500 7002.5,4500 7035,4532.5 7035,4666.72 v1(7096.78,4728.51)
  Bottom Layer w20: J3.5@5714.96,8081.5 TP642.1@5715,8080 TP642.1@5715,8080 5763.03,8031.97
IS2+: J1.50 R1139.1 R2239.1 TP215.1 TP524.1 | length 3417.4
  Top Layer w10: v1(6960.38,4964.65) 6966.34,4970.61 7010,4970.61 ; R1139.1@7010,4940 7010,4970.61 ; v1(7089,6935.64) 7089,6840.28 7086.64,6837.93 7086.64,6131.78 7077.67,6122.81 7077.67,6012.95 7087.5,6003.12 7087.5,5673.6 7040,5626.1 7040,5014.79 7010,4984.79 7010,4970.61
  Bottom Layer w10: v1(6960.38,4964.65) 7019.65,4964.65 7025,4970 TP524.1@7060,4970 ; v1(7089,6935.64) 7089,7179.1 7110,7200.1 7110,7314.5 7151.38,7355.88 7213.77,7355.88 7272.5,7414.61 7272.5,7632.51 7251.45,7653.56 7251.45,7729.55 7221,7760 R2239.1@7220,7760 7220,7870 7257.99,7907.99 ; TP215.1@7330,7980 J1.50@7331.5,7981.5
  Bottom Layer w20: 7257.99,7907.99 TP215.1@7330,7980
IS2-: J3.6 R1140.1 R2234.1 TP643.1 | length 3026.5
  Top Layer w10: v1(6791,6864.79) 6791,6834 6784.19,6827.18 6784.19,6529.08 6760,6504.89 6760,6350.42 6801,6309.42 6801,6214.29 6894.68,6120.61 6976.89,6120.61 7007.5,6090 R1140.1@7010,6090
  Bottom Layer w10: J3.6@5714.96,7981.5 5714.96,7921.82 5775.36,7861.42 5805,7861.42 TP643.1@5805,7860 5876.47,7860 5902.46,7834.01 6148.44,7834.01 6170,7812.45 R2234.1@6170,7770 6170,7767.96 6149.74,7767.96 6138.77,7756.98 6138.77,7599.48 6095.36,7556.07 6095.36,7450.14 6203,7342.5 6274.76,7342.5 6434.45,7182.82 6549.75,7182.82 6558.79,7173.77 6679.94,7173.77 6704.63,7149.09 6704.63,7124.67 6740,7089.3 6740,6988.52 6693.7,6942.22 6693.7,6915.38 6744.29,6864.79 v1(6791,6864.79)
IT1+: J3.1 R1176.1 R2241.1 TP213.1 | length 4675.4
  Top Layer w10: J3.1@5914.96,8081.5 5990.18,8081.5 5997.71,8073.96 5997.71,7929.97 6138.69,7789 6138.69,7758.24 6121.57,7741.12 v1(6101.34,7741.12) ; v1(6052.05,4998.88) 6052.05,5162.04 6067.5,5177.49 6067.5,5975.7 6043.42,5999.78 6043.42,6198.71 6066.51,6221.8 6066.51,6443.19 6071,6447.68 6071,6895.37 6084.63,6909 v1(6084.63,6924.16)
  Bottom Layer w10: J3.1@5914.96,8081.5 5993.52,8081.5 TP213.1@6015,8060 6015,8026.36 6106.07,7935.29 6839.68,7935.29 6980,7794.97 R2241.1@6980,7760 ; R1176.1@5980,5000 6020.93,5000 6022.05,4998.88 v1(6052.05,4998.88) ; v1(6084.63,6924.16) 6075.08,6924.16 6075.08,7275.73 6127.61,7328.27 6127.61,7377.11 6075.13,7429.6 6075.13,7564.13 6117.81,7606.8 6117.81,7719.82 6096.51,7741.12 v1(6101.34,7741.12)
IT1-: J3.7 R1177.1 R2244.1 TP212.1 | length 2725.8
  Top Layer w10: v1(6075.35,6081.37) 6075.35,6202.35 6086.51,6213.51 6086.51,6434.91 6091,6439.4 6091,6886.74 6114.63,6910.37 6114.63,6941.03 6074.08,6981.58 6074.08,7328.04 v1(6077.69,7328.04)
  Bottom Layer w10: J3.7@5614.96,8081.5 5664.96,8031.5 5664.96,7920.04 TP212.1@5705,7880 5760.6,7824.4 5876.47,7824.4 5887.11,7813.77 5990.29,7813.77 6007.74,7796.32 6007.74,7771.26 6009,7770 R2244.1@6010,7770 6035.16,7770 6065.17,7739.99 6065.17,7710.61 6095.9,7679.88 6095.9,7613.18 6050.77,7568.05 6050.77,7495.77 6005,7450 6005,7367.86 6040.01,7332.85 6072.89,7332.85 v1(6077.69,7328.04) ; R1177.1@5960,5870 5960,5902.84 6038.79,5981.63 6038.79,6044.81 v1(6075.35,6081.37)
IT2+: J3.2 R1163.1 R2240.1 TP211.1 | length 4448.8
  Top Layer w10: R1163.1@6540,4760 6542.5,4760 6577.5,4725 6688.71,4725 6720,4756.29 6720,4799.72 6755.23,4834.95 6755.23,4989.21 6801.76,5035.73 6801.76,5653.51 6779,5676.27 6779,6112.71 6788.09,6121.8 6788.09,6198.91 6781,6206 6781,6301.14 6740,6342.14 6740,6513.18 6761,6534.18 6761,6877.22 6793.95,6910.17 6793.95,6960 6830,6996.05 v1(6830,7048.74)
  Bottom Layer w10: J3.2@5914.96,7981.5 6001,7981.5 6010,7972.5 TP211.1@6010,7970 6065,7915 6743.02,7915 6830,7828.02 R2240.1@6830,7760 6829,7760 6767.5,7698.5 6767.5,7512.85 6780,7500.35 6780,7382.5 6745,7347.5 6745,7300.36 6823.31,7222.05 6823.31,7048.74 v1(6830,7048.74)
IT2-: J3.8 R1165.1 R2236.1 TP641.1 | length 4561.9
  Top Layer w10: J3.8@5614.96,7981.5 5614.96,7884.77 5632.17,7867.56 5715.86,7867.56 5747.26,7836.16 5747.26,7681.33 5779,7649.6 R2236.1@5779,7620 ; R2236.1@5780,7620 R2236.1@5779,7620 ; v1(5800.63,4731.95) 5800.63,4909.42 5727.45,4982.6 5727.45,6366.31 5747.72,6386.58 5747.72,6575.37 5761,6588.65 5761,7348.76 5749,7360.76 5749,7611.93 5757.07,7620 R2236.1@5779,7620 ; v1(6614.19,4599.35) 6614.19,4487.66 6660,4441.85 R1165.1@6660,4400
  Bottom Layer w10: TP641.1@5615,7980 J3.8@5614.96,7981.5 ; v1(5800.63,4731.95) 5800.63,4730 6051.53,4730 6088.31,4766.78 6313.22,4766.78 6480.65,4599.35 v1(6614.19,4599.35)
LBS_SYNC: C426.1 D78.3 J7.13 R1484.1 R1487.2 TP644.1 | length 1965.8
  Top Layer w10: C426.1@170,5750 R1487.2@260,5750 ; R1484.1@300,6080 300,6059.44 224.63,5984.07 224.63,5957.23 248.61,5933.25 252.28,5933.25 297.5,5888.03 297.5,5759.68 287.82,5750 R1487.2@260,5750 ; 349.07,4600 372.31,4600 417.19,4644.89 417.19,5276.17 263.03,5430.33 263.03,5690.93 v1(260,5690.93) R1487.2@260,5750
  Top Layer w20: J7.13@300,4600 349.07,4600
  Bottom Layer w10: TP644.1@250,5640 250,5680.93 v1(260,5690.93) 250,5690.93 D78.3@250,5768.5
LBS_SYNC_F: R873.1 R1063.2 R1493.1 TP273.1 | length 6077.3
  Top Layer w10: R873.1@190,6080 v1(236.61,6080) ; v1(694.26,5825.63) 684.55,5825.63 684.55,5755.03 757.03,5682.55 802.79,5682.55 898.59,5586.75 898.59,5241.64 913.55,5226.69 913.55,5012.93 v1(882.4,4981.78) ; v1(721.32,1386.35) 723.74,1383.93 731.69,1383.93 838.33,1490.58 838.33,1728.76 914.48,1804.92 914.48,3237.14 866.08,3285.54 v1(862.78,3285.54) ; v1(1009.05,1281.59) 1011.36,1281.59 1011.36,1263.78 1040,1235.14 R1063.2@1040,1200
  Bottom Layer w10: R1493.1@190,6080 v1(236.61,6080) 236.61,6077.91 249.18,6077.91 388.65,6217.38 491.33,6217.38 594.24,6114.47 627.32,6114.47 642.19,6099.59 642.19,5873.79 690.35,5825.63 v1(694.26,5825.63) ; v1(721.32,1386.35) 782.67,1325 TP273.1@915,1325 962.15,1325 997.81,1289.34 997.81,1281.59 v1(1009.05,1281.59) ; v1(862.78,3285.54) 875.05,3285.54 875.05,4176.13 853.47,4197.72 853.47,4253.28 895.65,4295.47 895.65,4968.53 v1(882.4,4981.78)
MAIN_SCR_U_DOWN: D177.1 D177.2 R995.2 R2104.1 TP272.1 | length 6435
  Top Layer w10: R995.2@9060,1130 v1(9124.84,1130) R2104.1@9170,1130 ; D177.1@10352.5,6718.5 D177.2@10427.5,6718.5 10470.81,6718.5 10493.78,6695.53 v1(10493.78,6657.04)
  Bottom Layer w10: v1(9124.84,1130) 9454.56,1459.72 9454.56,2310.73 10522.61,3378.77 10522.61,6387.16 10482.42,6427.35 10482.42,6575 TP272.1@10495,6575 10493.78,6576.22 v1(10493.78,6657.04)
MAIN_SCR_U_DOWN_DRV: J1.1 R1148.2 TP645.1 | length 925.8
  Top Layer w10: 9775.63,8081.5 9781.05,8081.5 9822.7,8039.84 9822.7,7958.45 9930.17,7850.98 10095.47,7850.98 10132.67,7813.78 10132.67,7761.96 10156.84,7737.78 10270.64,7737.78 10328.42,7680 R1148.2@10410,7680
  Top Layer w20: J1.1@9731.5,8081.5 9775.63,8081.5
  Bottom Layer w10: TP645.1@9730,8080 9730,8081.5 J1.1@9731.5,8081.5
MAIN_SCR_U_UP: D180.1 D180.2 R996.2 R2103.1 TP30.1 TP271.1 | length 7156.3
  Top Layer w10: R996.2@9060,920 v1(9116.94,920) R2103.1@9170,920 ; D180.1@10052.5,6708.5 D180.2@10127.5,6708.5 10208.5,6708.5 TP30.1@10240,6740
  Bottom Layer w10: v1(9116.94,920) 9494.56,1297.62 9494.56,2292.68 10565,3363.12 10565,6745.71 10552.02,6758.69 10258.69,6758.69 TP30.1@10240,6740 10245,6735 TP271.1@10245,6660
MAIN_SCR_U_UP_DRV: J1.2 R1147.2 TP646.1 | length 601.4
  Top Layer w10: 9780.31,7972.55 9928.76,7824.11 10078.77,7824.11 10105.54,7797.34 10105.54,7725.4 10140.94,7690 R1147.2@10160,7690
  Top Layer w20: J1.2@9731.5,7981.5 9740.44,7972.55 9780.31,7972.55
  Bottom Layer w10: J1.2@9731.5,7981.5 9735,7981.5 TP646.1@9735,7975
MAIN_SCR_V_DOWN: D181.1 D181.2 R993.2 R2105.1 TP270.1 | length 6551.7
  Top Layer w10: D181.2@9827.5,6718.5 D181.1@9752.5,6718.5 9752.5,6663.75 9792.28,6623.97 10166.22,6623.97 v1(10189.75,6647.5)
  Bottom Layer w10: R993.2@9060,1500 R2105.1@9170,1500 9170,1527.54 9213.99,1571.53 9300.91,1571.53 9394.56,1665.18 9394.56,2335.58 10459.97,3400.99 10459.97,6357.17 10260,6557.14 TP270.1@10260,6565 10260,6583.69 10196.18,6647.5 v1(10189.75,6647.5)
MAIN_SCR_V_DOWN_DRV: J1.3 R1143.2 TP647.1 | length 410.9
  Top Layer w10: 9673.88,8039.11 9681.5,8031.5 9681.5,7950.81 9840,7792.31 R1143.2@9840,7760
  Top Layer w20: J1.3@9631.5,8081.5 9673.88,8039.11
  Bottom Layer w10: TP647.1@9630,8080 9630,8081.5 J1.3@9631.5,8081.5
MAIN_SCR_V_UP: D178.1 D178.2 R994.2 R2100.1 TP269.1 | length 7413.6
  Top Layer w10: R994.2@9060,1020 v1(9116.94,1020) R2100.1@9170,1020 ; D178.1@9592.5,6718.5 D178.2@9667.5,6718.5 9667.5,6650.47 9714.28,6603.69 10222.45,6603.69 10266.11,6647.35 10443.09,6647.35 10476.57,6613.87 10509.73,6613.87 v1(10530.94,6635.08)
  Bottom Layer w10: v1(9116.94,1020) 9474.56,1377.62 9474.56,2302.44 10544.69,3372.57 10544.69,6441.5 10532.85,6453.34 TP269.1@10532.85,6465 ; TP269.1@10530,6465 TP269.1@10532.85,6465 ; v1(10530.94,6635.08) 10543.27,6635.08 10543.27,6465 TP269.1@10532.85,6465
MAIN_SCR_V_UP_DRV: J1.4 R1149.2 TP648.1 | length 267.3
  Top Layer w10: J1.4@9631.5,7981.5 9631.5,7898.61 9730,7800.11 R1149.2@9730,7760
  Bottom Layer w10: J1.4@9631.5,7981.5 9635,7981.5 TP648.1@9635,7980
MAIN_SCR_W_DOWN: D179.1 D179.2 R998.2 R2101.1 TP268.1 | length 6279.5
  Top Layer w10: R998.2@9060,1230 v1(9119.71,1230) R2101.1@9170,1230
  Bottom Layer w10: v1(9119.71,1230) 9434.56,1544.86 9434.56,2319.01 10500.67,3385.12 10500.67,6373.04 10448.22,6425.49 10448.22,6426.78 10445,6430 TP268.1@10445,6465 10445,6465.52 10449.48,6470 10449.48,6650.17 10427.5,6672.15 D179.2@10427.5,6718.5 D179.1@10502.5,6718.5
MAIN_SCR_W_DOWN_DRV: J1.5 R1145.2 TP267.1 | length 1032.6
  Bottom Layer w10: J1.5@9531.5,8081.5 9592.46,8142.46 9778.75,8142.46 9819,8102.22 9819,7962.25 9881.25,7900 10054.52,7900 10154.52,7800 10180,7800 ; R1145.2@10180,7760 10180,7800 ; TP267.1@10275,7800 10180,7800
MAIN_SCR_W_UP: D176.1 D176.2 R997.2 R2102.1 TP266.1 | length 7192.3
  Top Layer w10: R997.2@9060,1330 v1(9118.31,1330) R2102.1@9170,1330 ; D176.1@9402.5,6718.5 D176.2@9477.5,6718.5 9477.5,6670.54 9518.48,6629.55 9650.76,6629.55 9696.9,6583.41 10230.46,6583.41 10264.4,6617.35 v1(10412.71,6617.35)
  Bottom Layer w10: v1(9118.31,1330) 9253.63,1465.32 9287.35,1465.32 9414.56,1592.53 9414.56,2327.3 10480.41,3393.15 10480.41,6365.01 10409.64,6435.79 10409.64,6614.28 v1(10412.71,6617.35) 10390.06,6640 TP266.1@10350,6640
MAIN_SCR_W_UP_DRV: J1.6 R1144.2 TP649.1 | length 242.5
  Top Layer w10: R1144.2@9500,7760 9496.38,7763.62 9496.38,7878.52 9531.5,7913.64 J1.6@9531.5,7981.5
  Bottom Layer w10: TP649.1@9530,7985 9530,7981.5 J1.6@9531.5,7981.5
Mod_OTP: Q186.3 R710.1 R1013.2 TP970.1 | length 7044.5
  Top Layer w10: v1(8737.78,3267.27) 8737.78,3316.35 8652.5,3401.62 8652.5,3853.12 8593.09,3912.53 8593.09,4035.58 8543.87,4084.79 8543.87,4200.29 8530.03,4214.12 8530.03,5625.93 8649.87,5745.76 8959.4,5745.76 9088.96,5875.32 v1(9088.96,7419.44) ; R1013.2@9060,1630 v1(9120.7,1630) R710.1@9170,1630 ; v1(9109.18,2112.52) 9117.6,2120.94 9117.6,2207.5 9166.52,2256.41 9166.52,2457.36 v1(9163.26,2457.36)
  Bottom Layer w10: v1(8737.78,3267.27) 8737.78,2866.49 8825.69,2778.58 8878.3,2778.58 9166.52,2490.36 9166.52,2457.36 v1(9163.26,2457.36) ; Q186.3@9040,7458.5 9075,7458.5 9088.96,7444.54 v1(9088.96,7419.44) ; v1(9109.18,2112.52) 9370.81,1850.9 9370.81,1682.61 9318.2,1630 TP970.1@9170,1630 v1(9120.7,1630)
Mod_OverTemp: J1.32 R2541.1 TP1868.1 | length 890.7
  Top Layer w10: J1.32@8231.5,7981.5 8331.43,7881.56 8486.49,7881.56 8562.23,7805.82 8614.72,7805.82 8614.72,7801.45 8619.09,7801.45 8620.96,7803.32 v1(8620.96,7804.35)
  Bottom Layer w10: v1(8620.96,7804.35) 8621.69,7804.35 8645.92,7828.57 8883.82,7828.57 8914.68,7797.71 ; R2541.1@8910,7720 8914.68,7720 8914.68,7797.71 ; TP1868.1@8935,7805 8921.97,7805 8914.68,7797.71
Mod_Temp: C535.1 J1.29 R1388.1 R2734.1 TP654.1 U225.3 | length 1284.5
  Top Layer w10: J1.29@8331.5,8081.5 8286.5,8036.5 8286.5,7955.39 8327.87,7914.02 8504.56,7914.02 8584.23,7834.35 8771.56,7834.35 8791.25,7814.66 8791.25,7710.01 ; R2734.1@8830,7705 8830,7709.6 8791.25,7709.6 8791.25,7710.01 ; R1388.1@8960,7620 8946.1,7620 8871.88,7545.78 8768.69,7545.78 8755,7559.47 U225.3@8755,7610 8755,7704.34 8760,7709.34 C535.1@8760,7710 8791.25,7710.01
  Bottom Layer w10: TP654.1@8330,8080 8330,8081.5 J1.29@8331.5,8081.5
MODULE_ALARM_LED: J2.41 Q12.3 R1301.1 TP650.1 | length 1391.9
  Top Layer w10: Q12.3@1080,7241.5 1240,7241.5 R1301.1@1240,7240 1306.13,7240 1329,7262.87 1329,7838.18 1257.36,7909.81 1257.36,8036.5 J2.41@1302.36,8081.5
  Bottom Layer w10: J2.41@1302.36,8081.5 1251.62,8030.76 1251.62,7948.38 TP650.1@1330,7870
MODULE_ID_B0: J2.40 R2540.1 TP1870.1 | length 4153.3
  Top Layer w10: v1(1301.91,6058.21) 1301.91,6058.39 1316.65,6073.14 1316.65,6194.61 v1(1316.65,6224.61) ; v1(1345.09,6493) 1345.09,6523 1357.83,6535.74 1357.83,6643.88 1318.73,6682.98 1318.73,6891.76 1359,6932.03 1359,7938.14 J2.40@1402.36,7981.5 ; R2540.1@1410,4020 1410,4077.77 v1(1442.84,4110.61)
  Bottom Layer w10: v1(1301.91,6058.21) TP1870.1@1301.91,5970 ; TP1870.1@1305,5970 TP1870.1@1301.91,5970 ; v1(1316.65,6224.61) 1341.54,6249.49 1341.54,6493 v1(1345.09,6493) ; v1(1442.84,4110.61) 1437.01,4110.61 1437.01,4140.61 1284.86,4292.76 1284.86,4670.32 1302.62,4688.08 1302.62,4805.22 1274.71,4833.13 1274.71,5898.15 1301.91,5925.35 TP1870.1@1301.91,5970
MODULE_ID_B0_I: Q187.3 R720.1 R1000.2 TP1869.1 | length 8363
  Top Layer w10: Q187.3@1540,3681.5 1583.34,3681.5 1626.37,3638.47 1626.37,3405.19 1658.95,3372.61 v1(1658.95,3341.02) ; R1000.2@8500,2170 R720.1@8500,2240 v1(8549,2240)
  Bottom Layer w10: v1(1658.95,3341.02) 1917.94,3341.02 2048.54,3471.62 2620.19,3471.62 2854.91,3236.9 3744.75,3236.9 3828.26,3153.39 3990.7,3153.39 4077.13,3066.96 4161.33,3066.96 4183.85,3044.44 4212.33,3044.44 4236.47,3068.58 4359.52,3068.58 4376.89,3051.21 4480.08,3051.21 4496.61,3067.73 4735.81,3067.73 4752.25,3051.29 4974.85,3051.29 4998.03,3074.47 5568.1,3074.47 5657.91,2984.66 6382.15,2984.66 6405.98,2960.82 6993.47,2960.82 7054.38,3021.73 7119.67,3021.73 7177.61,2963.79 7453.45,2963.79 7523.91,2893.33 7773.51,2893.33 7976.25,2690.58 7976.25,2415.35 8167.38,2224.22 8167.38,2176.94 8194.24,2150.08 8459.08,2150.08 TP1869.1@8499.5,2190.5 ; TP1869.1@8505,2185 TP1869.1@8499.5,2190.5 ; v1(8549,2240) TP1869.1@8499.5,2190.5
MODULE_ID_B1: J2.42 R1167.1 TP265.1 | length 295.7
  Bottom Layer w10: J2.42@1302.36,7981.5 1408.86,7875 TP265.1@1420,7875 1490,7805 R1167.1@1490,7770
MODULE_ID_B1_I: Q22.3 R686.2 R687.1 R1003.2 R1059.2 TP264.1 | length 15999.4
  Top Layer w10: v1(1044,6198.88) 1072.42,6170.45 1072.42,4564.67 1131.97,4505.12 1131.97,3319.39 1098.48,3285.89 1098.48,1563.22 799.36,1264.1 799.36,760.14 1019.5,540 1049.29,540 1116.35,472.94 1670.15,472.94 1689.5,453.59 v1(1751.4,453.59) 1751.4,449.46 1806.94,449.46 1832.29,474.8 1943.54,474.8 2005,536.26 2005,562.79 2013.21,570.99 2013.21,626.21 2037,650 R686.2@2080,650 R1003.2@2080,750
  Bottom Layer w10: v1(1044,6198.88) 1044,6198.69 1220.02,6198.69 1272.42,6251.09 1272.42,6426.24 1196.26,6502.4 1196.26,6606 1165.86,6636.4 1165.86,6713.92 1181.94,6730 1332.52,6730 1335.81,6726.71 1399.36,6726.71 1425,6752.35 1425,7013.1 1510,7098.1 Q22.3@1510,7168.5 ; v1(1751.4,453.59) 1751.4,423.6 TP264.1@1795,380 1950.1,224.9 1967.76,224.9 2059.87,132.79 8175.79,132.79 8366.31,323.32 8427.84,323.32 8525,420.48 8525,512.11 8542.89,530 R687.1@8570,530 R1059.2@8570,600
MODULE_ID_B2: J2.44 R1168.1 TP263.1 | length 1216.9
  Bottom Layer w10: J2.44@1202.36,7981.5 1202.36,7881.91 1215.23,7869.04 1240.13,7869.04 1244.17,7865 TP263.1@1245,7865 1291.25,7818.75 1374.96,7818.75 1400,7793.71 1400,7112.26 1388.42,7100.68 1302.8,7100.68 1262.12,7060 R1168.1@1220,7060
MODULE_ID_B2_I: Q23.3 R678.2 R679.1 R1004.2 R1058.2 TP262.1 | length 14296.1
  Top Layer w10: R1058.2@1040,1100 R678.2@970,1100 970,1132.62 950.41,1152.2 898.71,1152.2 v1(895,1155.92) 873.79,1177.13 873.79,1253.5 1158.48,1538.2 1158.48,3174.18 1226.48,3242.18 1226.48,4534.05 1152.42,4608.1 1152.42,6232.12 1114.41,6270.14 1114.41,6436 1097.61,6452.8 v1(1095.89,6452.8) ; v1(1729.34,287.83) 1763,287.83 1778.17,272.66 1902.7,272.66 1955.95,325.92 v1(1967.81,325.92) ; R679.1@8470,510 v1(8470,556.28) R1004.2@8470,600
  Bottom Layer w10: v1(895,1155.92) 1005,1045.92 1005,995 TP262.1@1030,970 1030,967.22 1211.84,785.38 1270.3,785.38 1433.2,622.49 1433.2,562.24 1699.34,296.1 1729.34,296.1 v1(1729.34,287.83) ; Q23.3@1000,6588.5 1000,6563.62 1019.77,6543.85 1037.72,6543.85 1068.55,6513.02 1068.55,6479.11 1094.86,6452.8 v1(1095.89,6452.8) ; v1(1967.81,325.92) 1967.81,295.92 2090.93,172.79 8147.35,172.79 8401.81,427.25 8401.81,514.44 8443.65,556.28 v1(8470,556.28)
MODULE_ID_B3: J2.46 R1169.1 TP261.1 | length 378.1
  Bottom Layer w10: J2.46@1102.36,7981.5 1102.36,7840 TP261.1@1105,7840 1115.8,7829.2 1228.86,7829.2 1288.06,7770 R1169.1@1310,7770
MODULE_ID_B3_I: Q24.3 R684.2 R685.1 R1005.2 R1057.2 TP260.1 | length 15828.4
  Top Layer w10: v1(752.33,6453.17) 752.5,6453.17 752.5,6340.47 883.37,6209.6 990.45,6209.6 1052.42,6147.62 1052.42,4556.39 1111.71,4497.1 1111.71,3327.4 1078.48,3294.18 1078.48,1571.5 779.36,1272.38 779.36,751.86 1011.22,520 1041.01,520 1108.07,452.94 1661.87,452.94 1691.22,423.59 1835.74,423.59 v1(1856.95,444.8) 1941.83,444.8 2020.59,523.57 2096.64,523.57 2130,556.93 2130,631.27 2148.73,650 R684.2@2180,650 R1057.2@2180,750
  Bottom Layer w10: v1(752.33,6453.17) 752.5,6453.17 752.5,6454.95 735.12,6472.33 735.12,6665.62 840,6770.5 840,6883.71 861.47,6905.19 1078.9,6905.19 1155,6981.29 1155,7092.77 1166.13,7103.89 1222.56,7103.89 1250,7131.33 Q24.3@1250,7168.5 ; v1(1856.95,444.8) 1856.95,389.34 1907.84,338.45 1920,338.45 TP260.1@1920,340 1944.75,364.75 1992.01,364.75 2163.97,192.79 8068.91,192.79 8230,353.89 8230,427.92 8312.08,510 R685.1@8340,510 R1005.2@8340,600
MODULE_LED1: R744.2 R971.2 R1034.2 TP651.1 | length 6250.5
  Top Layer w10: R971.2@1240,6990 1184.39,6990 1115.74,6921.35 1115.74,6533.98 1183.43,6466.29 1183.43,6286 1192.42,6277 1192.42,4628.23 1266.48,4554.18 1266.48,3225.61 1198.48,3157.61 1198.48,1513.85 1146.55,1461.91 v1(1146.55,1267.5) 1167.76,1246.29 1257.45,1246.29 1270,1233.74 R744.2@1270,1200 R1034.2@1340,1200
  Bottom Layer w10: TP651.1@1070,1290 1132.2,1290 1146.55,1275.65 v1(1146.55,1267.5)
MODULE_LED2: R745.2 R972.2 R1033.2 TP259.1 | length 6394.4
  Top Layer w10: R972.2@1040,7350 1040,7324.69 948.59,7233.28 948.59,6955.82 954.21,6950.2 1027.94,6950.2 1095.74,6882.41 1095.74,6507.69 1113.95,6489.48 1125.05,6489.48 1125.05,6490.19 v1(1116.81,6490.19) ; v1(1220.64,6397.65) 1220.64,6367.65 1212.42,6359.43 1212.42,4637.14 1286.48,4563.08 1286.48,3206.11 1266.57,3186.19 1266.57,2751.86 1270,2748.43 R745.2@1270,1300 R1033.2@1340,1300
  Bottom Layer w10: v1(1116.81,6490.19) 1143.22,6490.19 1185,6448.41 TP259.1@1185,6430 1217.35,6397.65 v1(1220.64,6397.65)
MODULE_OK_LED: J2.43 Q13.3 R1302.1 TP652.1 | length 603
  Top Layer w10: J2.43@1202.36,8081.5 1157.36,8036.5 1157.36,7934.49 1230.64,7861.21 1230.64,7760 1230.95,7760 ; Q13.3@1210,7591.5 1213.07,7591.5 1213.07,7685.88 1230.95,7703.75 1230.95,7760 ; R1302.1@1280,7760 1230.95,7760
  Bottom Layer w10: J2.43@1202.36,8081.5 1205,8081.5 TP652.1@1205,8080
MODULE_READY: J2.39 R1170.1 TP279.1 | length 1222.4
  Bottom Layer w10: J2.39@1402.36,8081.5 1447.54,8036.31 1447.54,7952.13 1499.44,7900.23 1619.77,7900.23 TP279.1@1655,7865 1668.55,7851.45 1668.55,7157.65 1620,7109.09 R1170.1@1620,7060
MODULE_READY_I: Q25.3 R681.2 R682.1 R1002.2 R1055.2 TP278.1 | length 14776.5
  Top Layer w10: v1(976.48,6179.6) 1031.66,6124.43 1031.66,4548.87 1091.44,4489.09 1091.44,3335.42 1041.11,3285.09 1041.11,1562.42 759.36,1280.67 759.36,743.58 1002.93,500 1032.73,500 1099.79,432.94 1642.43,432.94 1671.78,403.59 1928.98,403.59 2028.96,503.57 2212.74,503.57 2228.99,519.82 v1(2299.25,519.82) ; R682.1@8260,510 v1(8260,556.01) R1055.2@8260,600
  Bottom Layer w10: v1(976.48,6179.6) 1006.48,6179.6 1017.21,6168.88 1218.5,6168.88 1292.42,6242.8 1292.42,6462.58 TP278.1@1255,6500 1250,6500 Q25.3@1250,6588.5 ; R1002.2@2350,750 R681.2@2350,650 2319,650 2250,581 2250,539.07 2269.25,519.82 v1(2299.25,519.82) 2430.04,519.82 2541.27,408.59 2853,408.59 3045.47,216.12 8029.58,216.12 8210,396.54 8210,450.58 8260,500.58 v1(8260,556.01)
MODULE_TYPE: R1154.1 TP1887.1 | length 85
  Bottom Layer w10: TP1887.1@7325,290 R1154.1@7410,290
MODULE_TYPE_I: Q33.3 R688.1 R689.2 R1001.2 R1060.2 TP277.1 | length 6225.5
  Top Layer w10: R688.1@8170,350 v1(8170,398.97) R1060.2@8170,450
  Bottom Layer w10: R1001.2@2440,750 R689.2@2440,650 2475.4,650 2480,645.4 2480,577.79 2523.04,534.75 2525.25,534.75 TP277.1@2550,510 2631.01,428.99 2862.95,428.99 3049.08,242.86 7972.86,242.86 8050,320 Q33.3@8050,358.5 8129.53,358.5 v1(8170,398.97)
N_DCBAT+: J1.36 R833.1 TP276.1 | length 366.6
  Bottom Layer w10: TP276.1@8030,7980 J1.36@8031.5,7981.5 ; 8047.08,7911.59 8057.62,7901.04 8181.6,7901.04 8240,7842.65 R833.1@8240,7780
  Bottom Layer w20: TP276.1@8030,7980 8038.29,7980 8038.29,7920.38 8047.08,7911.59
N_DCBAT-: J1.38 R796.1 TP655.1 | length 1028.5
  Top Layer w10: J1.38@7931.5,7981.5 7931.5,7909.27 7955.62,7885.15 8136.93,7885.15 8286.41,7735.67 8286.41,7372.6 8326.56,7332.45 8375.71,7332.45 8400,7308.15 R796.1@8400,7290
  Bottom Layer w10: J1.38@7931.5,7981.5 7935,7977.99 TP655.1@7935,7975
N_DCBUS+: J1.40 R831.1 TP656.1 | length 1632.7
  Top Layer w10: J1.40@7831.5,7981.5 7831.5,7917.84 7885.75,7863.59 8129.7,7863.59 8265.41,7727.87 8265.41,7137.79 8282.18,7121.02 8282.18,6889.75 8315.19,6856.75 8330.94,6856.75 8347.5,6840.19 v1(8347.5,6830.88) 8350.31,6833.69 8351.84,6833.69 8362.5,6823.03 8400,6823.03 R831.1@8400,6820
  Bottom Layer w10: v1(8347.5,6830.88) 8348.94,6830.88 8348.94,6853.94 8360,6865 TP656.1@8360,6880
N_DCBUS+OVP: J2.2 R852.1 TP657.1 | length 1184.1
  Top Layer w10: J2.2@3302.36,7981.5 3449.04,7834.81 3530.12,7834.81 3736.61,7834.81 3839.57,7731.86 3903.76,7731.86 4191,7444.62 4191,7418 4199,7410 R852.1@4230,7410
  Bottom Layer w10: J2.2@3302.36,7981.5 3305,7981.5 TP657.1@3305,7980
N_DCBUS-: J1.42 R798.1 TP275.1 | length 462.8
  Bottom Layer w10: 7730,7906.11 7802.81,7833.31 8021.74,7833.31 8039.86,7815.19 8039.86,7789.86 R798.1@8030,7780
  Bottom Layer w20: 7730,7906.11 TP275.1@7730,7980 J1.42@7731.5,7981.5
N_DCBUS-OVP: J2.4 R795.1 TP274.1 | length 415.3
  Bottom Layer w10: J2.4@3202.36,7981.5 3205,7981.5 TP274.1@3205,7980 ; 3205,7926.1 3205,7872.95 3266.29,7811.66 3430.98,7811.66 3444.58,7798.06 3444.58,7770 R795.1@3450,7770
  Bottom Layer w20: 3205,7926.1 TP274.1@3205,7980
N_VCHG+: J1.44 R835.1 TP658.1 | length 1071.7
  Top Layer w10: J1.44@7631.5,7981.5 7631.5,7908.75 7648.39,7891.85 7758.43,7891.85 7864.09,7786.19 7864.09,7355.22 7899.87,7319.44 7911.84,7319.44 7930.96,7300.33 7930.96,7247.18 7942.15,7235.99 8009.48,7235.99 8040,7266.51 R835.1@8040,7280
  Bottom Layer w10: TP658.1@7630,7980 J1.44@7631.5,7981.5
N_VCHG-: J1.46 R851.1 TP659.1 | length 1498.9
  Top Layer w10: J1.46@7531.5,7981.5 7531.5,7896.69 7577.61,7850.58 7743.13,7850.58 7817.5,7776.21 7817.5,7350.85 7799.69,7333.04 v1(7792.74,7333.04) 7798.73,7327.05 7800.37,7327.05 7800.37,7326.44 7779,7305.07 7779,6860.5 7829.5,6810 R851.1@7830,6810
  Bottom Layer w10: v1(7792.74,7333.04) 7792.74,7336.3 7820,7363.56 TP659.1@7820,7385
N_Vin_R: J3.12 R804.1 TP663.1 | length 344.6
  Top Layer w10: 5414.96,7936.52 5414.96,7921.91 5501.53,7835.33 5578.26,7835.33 5600,7813.6 R804.1@5600,7770
  Top Layer w20: 5414.96,7936.52 J3.12@5414.96,7981.5
  Bottom Layer w10: J3.12@5414.96,7981.5 5420,7981.5 TP663.1@5420,7975
N_Vin_S: J3.14 R808.1 TP664.1 | length 922.7
  Top Layer w10: 5320.25,7936.52 5320.25,7854.95 5337.04,7838.16 5337.04,7398.25 5391.37,7343.91 5497.1,7343.91 5520.48,7320.53 5574.85,7320.53 5590,7305.38 R808.1@5590,7270
  Top Layer w20: J3.14@5314.96,7981.5 5320.25,7976.2 5320.25,7936.52
  Bottom Layer w10: J3.14@5314.96,7981.5 TP664.1@5315,7985
N_Vin_T: J3.16 R812.1 TP665.1 | length 1444
  Top Layer w10: 5214.96,7936.93 5214.96,7901.55 5297.04,7819.47 5297.04,6938.25 5374.33,6860.96 5454.84,6860.96 5470.99,6844.8 5512.76,6844.8 5557.57,6800 R812.1@5600,6800
  Top Layer w20: 5214.96,7936.93 J3.16@5214.96,7981.5
  Bottom Layer w10: J3.16@5214.96,7981.5 5220,7981.5 TP665.1@5220,7980
N_VINVA: J2.18 R814.1 TP660.1 | length 1708.4
  Top Layer w10: R814.1@1905,6765 1909.95,6765 1909.95,6790.43 1915.9,6796.38 2040.81,6796.38 2069.5,6825.07 2069.5,7288.83 2109,7328.33 2109,7791.21 2117.79,7800 2237.87,7800 2304.51,7866.64 2465.27,7866.64 2502.36,7903.73 J2.18@2502.36,7981.5
  Bottom Layer w10: TP660.1@2500,7980 2500,7981.5 J2.18@2502.36,7981.5
N_VINVB: J2.20 R818.1 TP661.1 | length 1109.8
  Top Layer w10: R818.1@1910,7270 1910,7289.74 1923.26,7303 2023.67,7303 2066.61,7345.94 2066.61,7805.39 2101.22,7840 2218.9,7840 2286.26,7907.36 2392.95,7907.36 2402.36,7916.77 J2.20@2402.36,7981.5
  Bottom Layer w10: J2.20@2402.36,7981.5 2405,7981.5 TP661.1@2405,7980
N_VINVC: J2.22 R822.1 TP662.1 | length 411.3
  Top Layer w10: R822.1@2010,7770 2010,7807.85 2084.65,7882.5 2203.37,7882.5 J2.22@2302.36,7981.5
  Bottom Layer w10: J2.22@2302.36,7981.5 2305,7981.5 TP662.1@2305,7975